# EAGLE board EX Analog (EAGLE 7.2.0)
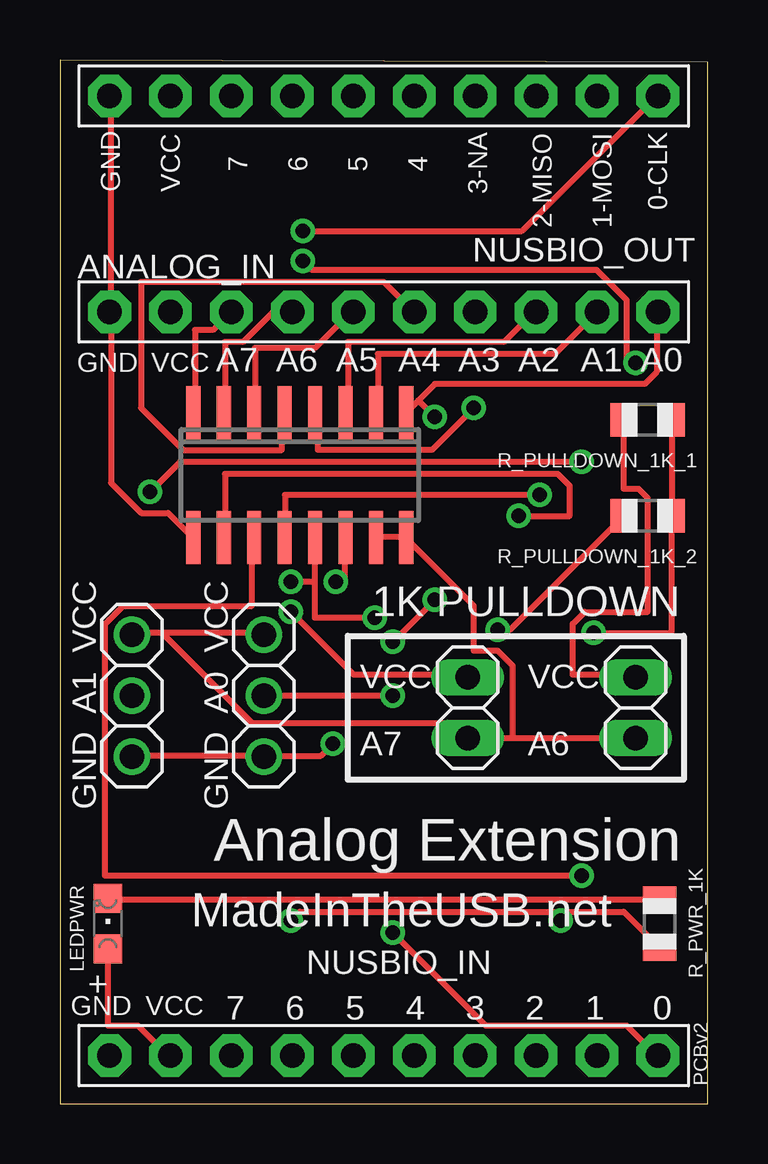
[diagram p0: board, top side]
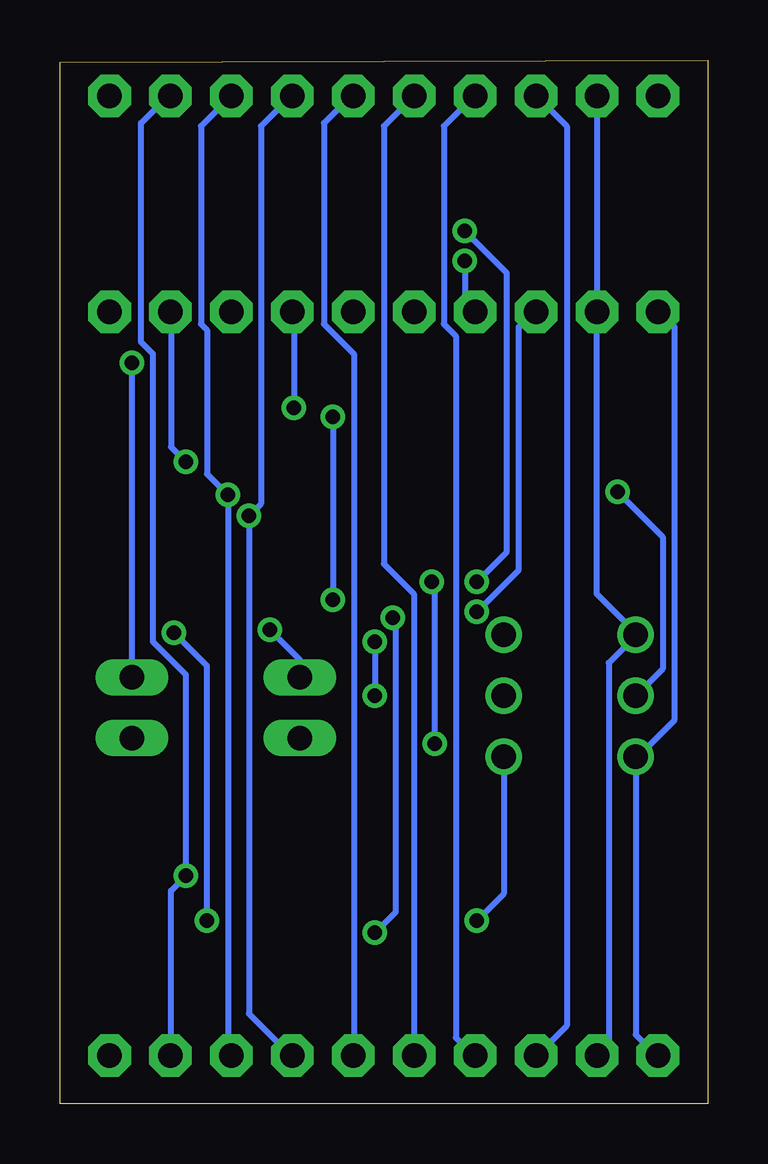
[diagram p1: board, bottom side, seen from below]

Size 27 x 43.5 mm. Coordinates in mm from the lower left corner, seen from the top.
Outline: 0,0 27,0 27,43.4 0,43.5 0,0
Copper layers (1*16): Top 0.035mm / dielectric 1.5mm / Bottom 0.035mm
Design rules "default": minimum track width 10mil, minimum drill 24mil, track to track 8mil, track to pad 8mil, pad to pad 8mil, via to via 8mil, smd to smd 8mil, copper to edge 40mil, drill to drill 8mil, minimum pad ring 10mil, minimum via ring 8mil, stop-mask expansion 4mil, vias tented up to drill 0mil, thermal gap 10mil

## Footprints (pad centres in the part's own frame; a part is rotated, then mirrored left to right if it is on the bottom)
1X10-BIG = drill 1.016 pad 1.778 octagon: 1 -11.43,0; 2 -8.89,0; 3 -6.35,0; 4 -3.81,0; 5 -1.27,0; 6 1.27,0; 7 3.81,0; 8 6.35,0; 9 8.89,0; 10 11.43,0
CHIPLED_0805 = smd 1.2 x 1.2: A 0,-1.05; C 0,1.05
1X02 = drill 1.016 long: 1 -1.27,0; 2 1.27,0
R0805 = smd 1.1 x 1.4: 1 -1,0; 2 1,0
SO16 = smd 0.6 x 2.2: 1 -4.445,-2.6; 2 -3.175,-2.6; 3 -1.905,-2.6; 4 -0.635,-2.6; 5 0.635,-2.6; 6 1.905,-2.6; 7 3.175,-2.6; 8 4.445,-2.6; 9 4.445,2.6; 10 3.175,2.6; 11 1.905,2.6; 12 0.635,2.6; 13 -0.635,2.6; 14 -1.905,2.6; 15 -3.175,2.6; 16 -4.445,2.6
1X03 = drill 1.016: 1 -2.54,0; 2 0,0; 3 2.54,0

## Placement (x,y rotation side)
ANALOG_IN  PINHD-1X10  [1X10-BIG]  13.5,33 180 top
LEDPWR  [CHIPLED_0805]  2,7.5 0 top
NUSBIO_IN  PINHD-1X10  [1X10-BIG]  13.5,2 180 top
NUSBIO_OUT  PINHD-1X10  [1X10-BIG]  13.5,42 180 top
PULLDOWN_1K_A6  [1X02]  24,16.5 90 top
PULLDOWN_1K_A7  [1X02]  17,16.5 90 top
R_PULLDOWN_1K_1  [R0805]  24.5,28.5 0 top
R_PULLDOWN_1K_2  [R0805]  24.5,24.5 0 top
R_PWR_1K  [R0805]  25,7.5 90 top
U$1  MCP3008SL  [SO16]  10,26.2 180 top
VCC_A0_GND  [1X03]  8.5,17 270 top
VCC_A1_GND  [1X03]  3,17 270 top

## Library data of the parts
ANALOG_IN LEDPWR NUSBIO_IN NUSBIO_OUT R_PULLDOWN_1K_1 R_PULLDOWN_1K_2 R_PWR_1K VCC_A0_GND VCC_A1_GND = adafruit
PULLDOWN_1K_A6 PULLDOWN_1K_A7 = pinhead
U$1 = MCP3008

## Nets
GND: ANALOG_IN.10 NUSBIO_IN.10 NUSBIO_OUT.10 R_PULLDOWN_1K_1.2 R_PULLDOWN_1K_2.2 R_PWR_1K.1 U$1.9 U$1.14 VCC_A0_GND.3 VCC_A1_GND.3
N$1: NUSBIO_IN.1 NUSBIO_OUT.1 U$1.13
N$2: NUSBIO_IN.2 NUSBIO_OUT.2 U$1.11
N$3: NUSBIO_IN.3 NUSBIO_OUT.3 U$1.12
N$4: NUSBIO_IN.5 NUSBIO_OUT.5
N$5: NUSBIO_IN.4 NUSBIO_OUT.4 U$1.10
N$6: LEDPWR.C R_PWR_1K.2
N$7: NUSBIO_IN.6 NUSBIO_OUT.6
N$8: NUSBIO_IN.7 NUSBIO_OUT.7
N$9: NUSBIO_IN.8 NUSBIO_OUT.8
N$10: ANALOG_IN.1 U$1.1 VCC_A0_GND.2
N$11: ANALOG_IN.2 U$1.2 VCC_A1_GND.2
N$12: ANALOG_IN.3 U$1.3
N$13: ANALOG_IN.4 U$1.4
N$14: ANALOG_IN.6 U$1.6
N$15: ANALOG_IN.7 PULLDOWN_1K_A6.2 R_PULLDOWN_1K_1.1 U$1.7
N$16: ANALOG_IN.8 PULLDOWN_1K_A7.2 R_PULLDOWN_1K_2.1 U$1.8
N$17: ANALOG_IN.5 U$1.5
N$18: ANALOG_IN.9 LEDPWR.A NUSBIO_IN.9 NUSBIO_OUT.9 PULLDOWN_1K_A6.1 PULLDOWN_1K_A7.1 U$1.15 U$1.16 VCC_A0_GND.1 VCC_A1_GND.1

## Tracks (layer width: path | path; a pad name or v marks a point on that pad's centre or on a via)
GND  (via drill 0.61)
  Top 0.254: U$1.9 5.5,23.62 4.5,24.62 3.38,24.62 2.12,25.88 2.12,33 ANALOG_IN.10 2.12,33.12 2.12,42 NUSBIO_OUT.10 | R_PULLDOWN_1K_1.2 R_PULLDOWN_1K_2.2 25.5,19.62 v22.25,19.62 | R_PWR_1K.1 23.5,8 20.88,8 | 20.88,8 10,8 v9.62,7.62 | v11.5,21.75 11.88,21.75 11.88,23.5 U$1.14 | v11.38,15 10.88,14.5 8.5,14.5 VCC_A0_GND.3 8.38,14.5 3,14.5 VCC_A1_GND.3 | 20.88,8 v20.88,7.62
  Bottom 0.254: v9.62,7.62 8.5,8.75 VCC_A0_GND.3 | v11.5,21.75 11.38,21.62 v11.38,15 | v22.25,19.62 20.88,18.25 v20.88,7.62 | NUSBIO_IN.10 2.12,2 3,2.88 VCC_A1_GND.3 2.88,14.5 1.38,16 1.38,32.38 2,33 ANALOG_IN.10
N$1  (via drill 0.61)
  Top 0.254: 10.62,21.75 10.62,20.25 v13.12,20.25 | 10.62,21.75 10.62,23.5 U$1.13 | v13.88,7.12 17.75,3.25 23.62,3.25 24.88,2 NUSBIO_IN.1 | v10.12,36.38 19.25,36.38 24.88,42 NUSBIO_OUT.1 | 10.62,21.75 v9.62,21.75
  Bottom 0.254: v13.12,20.25 13,20.12 13,8 v13.88,7.12 | v10.12,36.38 8.38,34.62 8.38,23 v9.62,21.75
N$2  (via drill 0.61)
  Top 0.254: v21.75,9.5 1.88,9.5 1.88,20 2.62,20.75 8,20.75 8,23.5 U$1.11
  Bottom 0.254: NUSBIO_IN.2 22.38,2 22.38,8.88 v21.75,9.5 21.75,17.88 23.12,19.25 23.12,31.25 23.62,31.75 23.62,40.88 22.5,42 NUSBIO_OUT.2
N$3  (via drill 0.61)
  Top 0.254: v20,25.38 9.38,25.38 9.38,23.62 U$1.12
  Bottom 0.254: NUSBIO_OUT.3 19.88,42 21.12,40.75 21.12,32.5 20.88,32.25 20.88,26.25 v20,25.38 20,2.12 19.88,2 NUSBIO_IN.3
N$4
  Bottom 0.254: NUSBIO_IN.5 14.75,2 14.75,31.25 16,32.5 16,40.88 14.88,42 NUSBIO_OUT.5
N$5  (via drill 0.61)
  Top 0.254: v19.12,24.5 21.25,24.5 21.25,25.75 20.75,26.25 6.88,26.25 6.88,23.62 U$1.10
  Bottom 0.254: NUSBIO_OUT.4 17.38,42 18.62,40.75 18.62,25 v19.12,24.5 19.12,3.75 17.38,2 NUSBIO_IN.4
N$6
  Top 0.254: R_PWR_1K.2 2,8.5 LEDPWR.C
N$7
  Bottom 0.254: NUSBIO_IN.6 12.25,2 12.25,21.25 13.5,22.5 13.5,40.75 12.25,42 NUSBIO_OUT.6
N$8
  Bottom 0.254: NUSBIO_IN.7 9.75,2 10.5,2.75 10.5,32 11,32.5 11,40.75 9.75,42 NUSBIO_OUT.7
N$9
  Bottom 0.254: NUSBIO_IN.8 7.12,2 5.88,3.25 5.88,40.75 7.12,42 NUSBIO_OUT.8
N$10  (via drill 0.61)
  Top 0.254: 14.94,29.31 15.62,30 24.38,30 24.88,30.5 24.88,33 ANALOG_IN.1 | 14.94,29.31 14.5,28.88 U$1.1 | v13.88,17 VCC_A0_GND.2 | v15.62,21 v13.88,19.25 | 14.94,29.31 v15.62,28.62
  Bottom 0.254: v13.88,19.25 v13.88,17 | v15.62,28.62 v15.62,21
N$11  (via drill 0.61)
  Top 0.254: U$1.2 13.25,28.88 13.25,31.25 20.62,31.25 22.38,33 ANALOG_IN.2 | v3.75,25.5 5,26.75 v21.75,26.75
  Bottom 0.254: VCC_A1_GND.2 1.88,18.12 1.88,23.62 v3.75,25.5 | v21.75,26.75 22.38,27.38 22.38,33 ANALOG_IN.2
N$12
  Top 0.254: U$1.3 12,28.88 12,31.75 18.5,31.75 19.75,33 ANALOG_IN.3
N$13  (via drill 0.61)
  Top 0.254: v17.25,29 15.5,27.25 10.75,27.25 10.75,28.75 U$1.4
  Bottom 0.254: v17.25,29 17.25,33 ANALOG_IN.4
N$14
  Top 0.254: U$1.6 8.12,28.88 8.12,31.5 10.62,31.5 12.12,33 ANALOG_IN.6
N$15  (via drill 0.61)
  Top 0.254: ANALOG_IN.7 8.88,33 7.62,31.75 6.88,31.75 6.88,28.88 U$1.7 | R_PULLDOWN_1K_1.1 23.5,25.62 24.12,25.62 24.5,25.25 24.5,20.5 21.88,20.5 21.38,20 21.38,17.88 24,17.88 PULLDOWN_1K_A6.2 | v10.12,35.12 10.5,34.75 22.38,34.75 23.62,33.5 23.62,30.88 v24,30.88
  Bottom 0.254: v10.12,35.12 10.12,33.38 9.75,33 ANALOG_IN.7 | PULLDOWN_1K_A6.2 v24,30.88
N$16  (via drill 0.61)
  Top 0.254: U$1.8 5.62,28.88 5.62,32.25 6.38,32.25 7.12,33 ANALOG_IN.8 | R_PULLDOWN_1K_2.1 18.75,19.75 v18.25,19.75 | v9.62,20.5 12.25,17.88 17,17.88 PULLDOWN_1K_A7.2
  Bottom 0.254: v18.25,19.75 17,18.5 PULLDOWN_1K_A7.2 | v9.62,20.5 7.88,22.25 7.88,32.38 7.25,33 ANALOG_IN.8
N$17
  Top 0.254: U$1.5 9.25,28.75 9.25,27.25 5.12,27.25 3.38,29 3.38,34.25 13.5,34.25 14.75,33 ANALOG_IN.5
N$18
  Top 0.254: U$1.15 13.25,23.62 14.38,23.62 U$1.16 14.5,23.5 17.25,20.75 17.25,18.88 18.25,18.88 18.88,18.25 18.88,15.25 | 18.88,15.25 17,15.25 PULLDOWN_1K_A7.1 16.88,15.25 16.25,15.88 8,15.88 4.38,19.5 4.38,19.62 | 18.88,15.25 24,15.25 PULLDOWN_1K_A6.1 | LEDPWR.A 2,3.25 3.25,3.25 4.5,2 NUSBIO_IN.9 | 4.38,19.62 8.5,19.62 VCC_A0_GND.1 | 4.38,19.62 3,19.62 VCC_A1_GND.1
  Bottom 0.254: NUSBIO_OUT.9 4.62,42 4.62,33 ANALOG_IN.9 4.62,32.88 4.62,21.25 3,19.62 VCC_A1_GND.1 3,19.5 4.12,18.38 4.12,2.38 4.5,2 NUSBIO_IN.9

## Text on the board
tNames: 7 | 6 | 5 | 4 | 3-NA | 0-CLK | GND | VCC | 2-MISO | 1-MOSI | GND | VCC | A7 | A6 | A5 | A4 | A3 | A2 | A1 | A0 | VCC | VCC | 1K PULLDOWN | A1 | A0 | VCC | VCC | GND | GND | A7 | A6 | Analog Extension | MadeInTheUSB.net | + | GND | VCC | 7 | 6 | 5 | 4 | 3 | 2 | 1 | 0 | PCBv2